# EAGLE board Roboteq_Board_V1.2 (EAGLE 9.6.2)
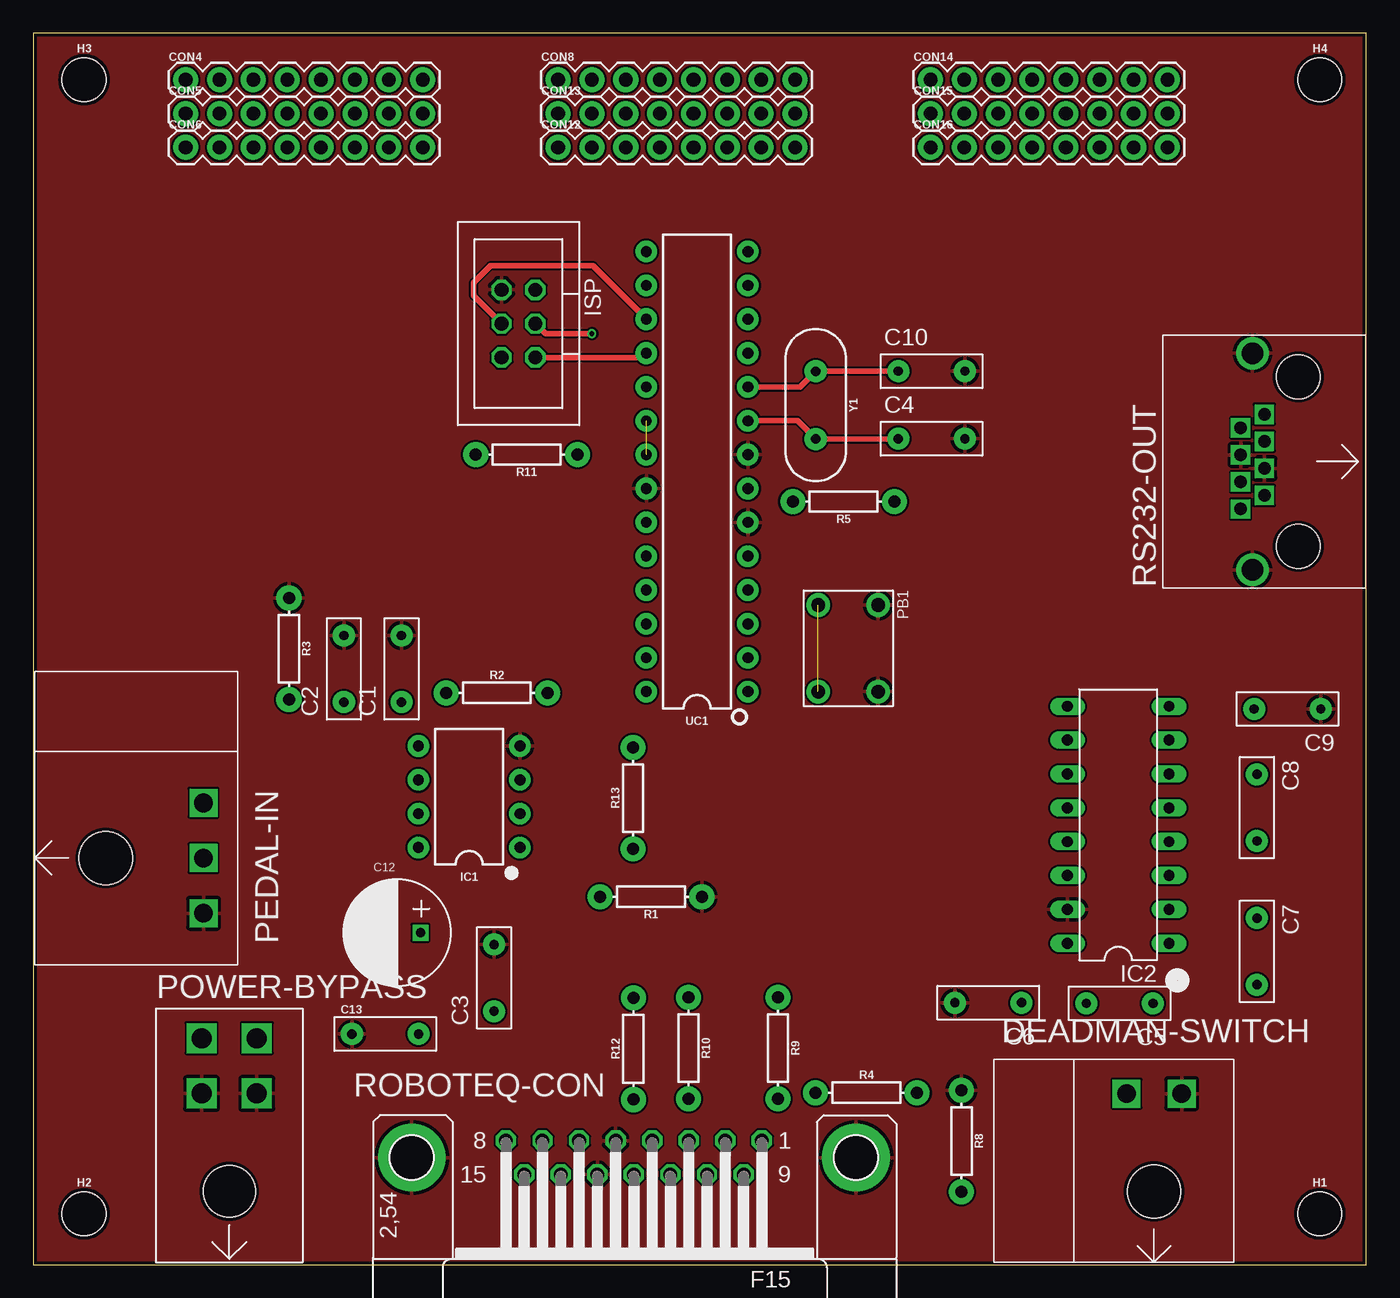
[diagram p0: board, top side]
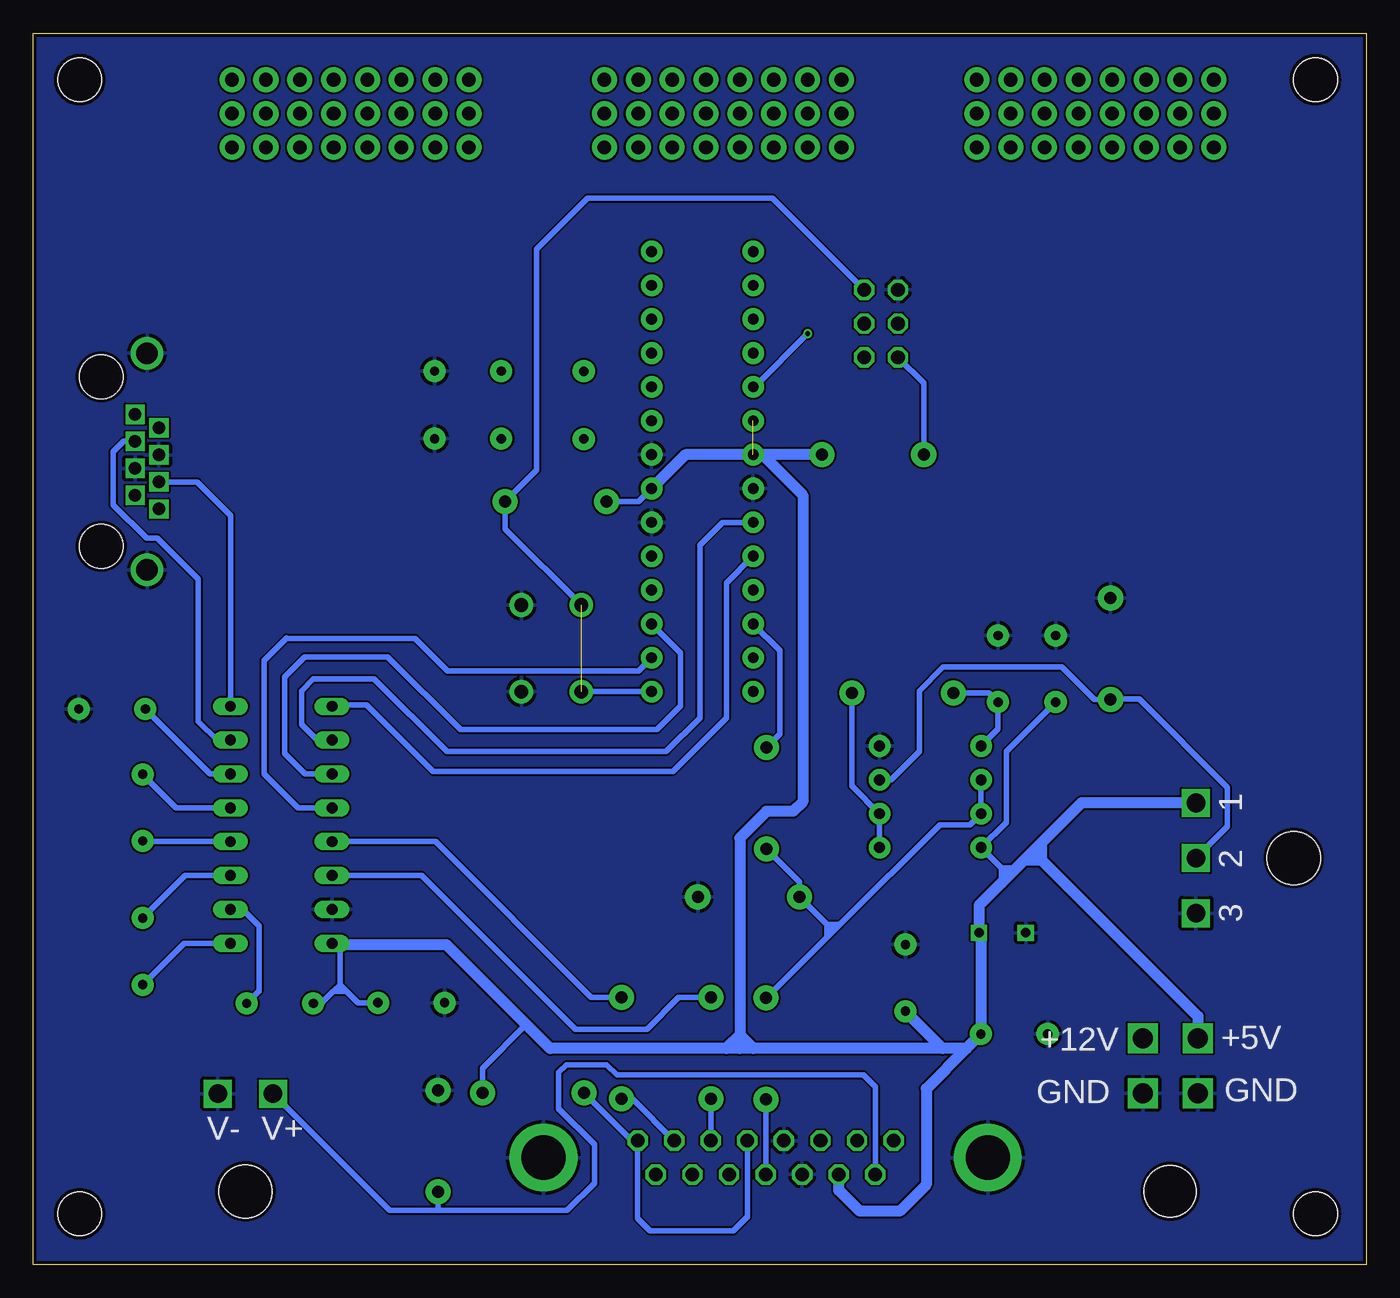
[diagram p1: board, bottom side, seen from below]

Size 100 x 92.38 mm. Coordinates in mm from the lower left corner, seen from the top.
Outline: 0,0 100,0 100,92.38 0,92.38 0,0
Copper layers (1*16): Top 0.035mm / dielectric 1.5mm / Bottom 0.035mm
Design rules "SeeedStudio_2layer_DRU_no_angle_20140221": minimum track width 6mil, minimum drill 12mil, track to track 6mil, track to pad 6mil, pad to pad 6mil, via to via 6mil, smd to smd 0mil, copper to edge 10mil, drill to drill 10mil, minimum pad ring 10mil, minimum via ring 6mil, stop-mask expansion 2mil, vias tented up to drill 100mil, thermal gap 10mil

## Footprints (pad centres in the part's own frame; a part is rotated, then mirrored left to right if it is on the bottom)
CAP-PTH-5MM = drill 0.7 pad 1.651: 1 -2.5,0; 2 2.5,0
CAPACITOR_100UF_50V = drill 0.7 square: + 1.75,0; - -1.75,0
1X08 = drill 1.016 pad 1.88: 1 0,0; 2 2.54,0; 3 5.08,0; 4 7.62,0; 5 10.16,0; 6 12.7,0; 7 15.24,0; 8 17.78,0
TE_2-PIN = drill 1.4 square: 1 -2.07,12.67; 2 2.07,12.67 | hole 4: 0,5.33
STAND-OFF = hole 3.302: 0,0
DIP08 = drill 0.813 pad 1.626: 1 -3.81,-3.81; 2 -1.27,-3.81; 3 1.27,-3.81; 4 3.81,-3.81; 5 3.81,3.81; 6 1.27,3.81; 7 -1.27,3.81; 8 -3.81,3.81
DIP16 = drill 0.813 long: 1 -8.89,-3.81; 2 -6.35,-3.81; 3 -3.81,-3.81; 4 -1.27,-3.81; 5 1.27,-3.81; 6 3.81,-3.81; 7 6.35,-3.81; 8 8.89,-3.81; 9 8.89,3.81; 10 6.35,3.81; 11 3.81,3.81; 12 1.27,3.81; 13 -1.27,3.81; 14 -3.81,3.81; 15 -6.35,3.81; 16 -8.89,3.81
ISP_CONNECTOR = drill 1.016 octagon: 1 2.54,1.27; 2 2.54,-1.27; 3 0,1.27; 4 0,-1.27; 5 -2.54,1.27; 6 -2.54,-1.27
PUSHBUTTON = drill 1.04 pad 1.778: 1 0,0; 2 6.5,0; 3 0,4.5; 4 6.5,4.5
TE_3-PIN = drill 1.4 square: 1 -4.14,12.67; 2 0,12.67; 3 4.14,12.67 | hole 4: 0,5.33
TE_4-PIN = drill 1.5 square: 1 2.07,11.48; 2 -2.07,11.48; 3 2.07,7.34; 4 -2.07,7.34 | hole 3.91: 0,0
AXIAL-0.3 = drill 0.9 pad 1.88: P$1 -3.81,0; P$2 3.81,0
D-SUB_2-ROW_15-PIN = drill 1.016 octagon: 1 -9.601,-1.27; 2 -6.858,-1.27; 3 -4.115,-1.27; 4 -1.372,-1.27; 5 1.372,-1.27; 6 4.115,-1.27; 7 6.858,-1.27; 8 9.601,-1.27; 9 -8.23,1.27; 10 -5.486,1.27; 11 -2.743,1.27; 12 0,1.27; 13 2.743,1.27; 14 5.486,1.27; 15 8.23,1.27 | drill 3.302 pad 5.08: G1 -16.662,0; G2 16.662,0
RJ45 = drill 0.94 square: 1 9.9,2.54; 2 8.88,4.32; 3 7.87,2.54; 4 6.85,4.32; 5 5.84,2.54; 6 4.82,4.32; 7 3.81,2.54; 8 2.79,4.32 | drill 1.62: 9 -1.78,3.43; 10 14.48,3.43 | hole 3.3: 0,0; 12.7,0
DIP28 = drill 0.813 pad 1.626: 1 -16.51,-3.81; 2 -13.97,-3.81; 3 -11.43,-3.81; 4 -8.89,-3.81; 5 -6.35,-3.81; 6 -3.81,-3.81; 7 -1.27,-3.81; 8 1.27,-3.81; 9 3.81,-3.81; 10 6.35,-3.81; 11 8.89,-3.81; 12 11.43,-3.81; 13 13.97,-3.81; 14 16.51,-3.81; 15 16.51,3.81; 16 13.97,3.81; 17 11.43,3.81; 18 8.89,3.81; 19 6.35,3.81; 20 3.81,3.81; 21 1.27,3.81; 22 -1.27,3.81; 23 -3.81,3.81; 24 -6.35,3.81; 25 -8.89,3.81; 26 -11.43,3.81; 27 -13.97,3.81; 28 -16.51,3.81
HC49US = drill 0.7 pad 1.651: 1 -2.54,0; 2 2.54,0

## Placement (x,y rotation side)
C1  0.1uF  [CAP-PTH-5MM]  27.62,44.7 90 top
C2  0.1uF  [CAP-PTH-5MM]  23.3,44.7 90 top
C3  0.1uF  [CAP-PTH-5MM]  34.57,21.51 90 top
C4  22pF  [CAP-PTH-5MM]  67.39,61.97 0 top
C5  1uF  [CAP-PTH-5MM]  81.5,19.6 180 top
C6  1uF  [CAP-PTH-5MM]  71.64,19.65 180 top
C7  1uF  [CAP-PTH-5MM]  91.8,23.5 270 top
C8  1uF  [CAP-PTH-5MM]  91.8,34.29 270 top
C9  1uF  [CAP-PTH-5MM]  94.09,41.68 180 top
C10  22pF  [CAP-PTH-5MM]  67.39,67.03 0 top
C12  100uF  [CAPACITOR_100UF_50V]  27.3,24.9 0 top
C13  0.1uF  [CAP-PTH-5MM]  26.4,17.3 0 top
CON4  1X08  [1X08]  11.43,88.9 0 top
CON5  1X08  [1X08]  11.43,86.36 0 top
CON6  1X08  [1X08]  11.43,83.82 0 top
CON8  1X08  [1X08]  39.37,88.9 0 top
CON12  1X08  [1X08]  39.37,83.82 0 top
CON13  1X08  [1X08]  39.37,86.36 0 top
CON14  1X08  [1X08]  67.31,88.9 0 top
CON15  1X08  [1X08]  67.31,86.36 0 top
CON16  1X08  [1X08]  67.31,83.82 0 top
DEADMAN-SWITCH  TE_2-PIN  [TE_2-PIN]  84.08,0.16 0 top
H1  STAND-OFF  [STAND-OFF]  96.52,3.81 0 top
H2  STAND-OFF  [STAND-OFF]  3.81,3.81 0 top
H3  STAND-OFF  [STAND-OFF]  3.81,88.9 0 top
H4  STAND-OFF  [STAND-OFF]  96.52,88.9 0 top
IC1  TLV272  [DIP08]  32.7,35.1 90 top
IC2  RS232-TTL_MAX232E  [DIP16]  81.4,33 90 top
ISP  ISP  [ISP_CONNECTOR]  36.4,70.6 270 top
PB1  [PUSHBUTTON]  58.88,49.48 270 top
PEDAL-IN  TE_3-PIN  [TE_3-PIN]  0.1,30.5 270 top
POWER-BYPASS  TE_4-PIN  [TE_4-PIN]  14.7,5.5 0 top
R1  100k  [AXIAL-0.3]  46.34,27.59 180 top
R2  10k  [AXIAL-0.3]  34.77,42.9 0 top
R3  100k  [AXIAL-0.3]  19.18,46.2 270 top
R4  10k  [AXIAL-0.3]  62.5,12.9 0 top
R5  10k  [AXIAL-0.3]  60.79,57.25 180 top
R8  10k  [AXIAL-0.3]  69.64,9.27 270 top
R9  0  [AXIAL-0.3]  55.87,16.23 270 top
R10  0  [AXIAL-0.3]  49.16,16.24 270 top
R11  0  [AXIAL-0.3]  37.01,60.78 180 top
R12  0  [AXIAL-0.3]  45.02,16.19 90 top
R13  0  [AXIAL-0.3]  45,35 90 top
ROBOTEQ-CON  D-SUB_2-ROW_15-PIN  [D-SUB_2-ROW_15-PIN]  45.06,8.03 180 top
RS232-OUT  RJ45  [RJ45]  94.9,53.9 90 top
UC1  328P  [DIP28]  49.8,59.5 90 top
Y1  16MHz  [HC49US]  58.7,64.48 270 top

## Library data of the parts
C1-C10 C12 C13 R1-R5 R8-R13 = EcoCar-Passives
CON4-CON6 CON8 CON12-CON16 = EcoCar-Connectors-2.54mm
DEADMAN-SWITCH PEDAL-IN POWER-BYPASS ROBOTEQ-CON RS232-OUT = EcoCar-Connectors
H1-H4 = EcoCar-Miscellaneous
IC1 IC2 = EcoCar-Integrated-Circuits
ISP = EcoCar-Microcontrollers
PB1 = EcoCar-Electromechanical
UC1 = EcoCar-Microcontrollers; PROD_ID: IC-09136
Y1 = EcoCar-Microcontrollers; PROD_ID: XTAL-08181; SF_ID: COM-00536

## Nets
5V: C2.1 C3.1 C5.2 C6.1 C12.+ C13.2 IC1.8 IC2.16 PEDAL-IN.1 POWER-BYPASS.2 R4.P$2 R5.P$2 R11.P$1 ROBOTEQ-CON.14 UC1.7 UC1.20 UC1.21
ANALOG_MOTOR_SIGNAL: IC1.6 IC1.7 R1.P$2 R12.P$2 R13.P$1
CANH: ROBOTEQ-CON.7
CANL: ROBOTEQ-CON.6
DEADMAN_SWITCH: R4.P$1 ROBOTEQ-CON.1 ROBOTEQ-CON.4
DEADMAN_SWITCH2: DEADMAN-SWITCH.1 R8.P$2 ROBOTEQ-CON.15
DIN2: ROBOTEQ-CON.8
DIN4: ROBOTEQ-CON.11
DIN5: ROBOTEQ-CON.10
DOUT2: ROBOTEQ-CON.9
GND: C1.2 C2.2 C3.2 C4.2 C6.2 C9.1 C10.2 C12.- C13.1 DEADMAN-SWITCH.2 IC1.4 IC2.15 ISP.6 PB1.3 PB1.4 PEDAL-IN.3 POWER-BYPASS.3 POWER-BYPASS.4 R1.P$1 R3.P$1 R8.P$1 ROBOTEQ-CON.5 ROBOTEQ-CON.13 ROBOTEQ-CON.G1 ROBOTEQ-CON.G2 RS232-OUT.4 RS232-OUT.5 RS232-OUT.9 RS232-OUT.10 UC1.6 UC1.8 UC1.22
LOW_PASS_OUT: C1.1 IC1.5 R2.P$1
MISO: ISP.1 UC1.18
MOSI: ISP.4 UC1.17
N$1: R9.P$2 ROBOTEQ-CON.2
N$2: IC1.1 IC1.2 R2.P$2
N$3: R13.P$2 UC1.26
N$4: C4.1 UC1.9 Y1.2
N$5: C10.1 UC1.10 Y1.1
N$6: C7.2 IC2.1
N$7: C5.1 IC2.2
N$8: C7.1 IC2.3
N$9: C8.2 IC2.4
N$10: C8.1 IC2.5
N$11: C9.2 IC2.6
N$13: R10.P$2 ROBOTEQ-CON.3
N$14: ISP.2 R11.P$2
N$15: R12.P$1 ROBOTEQ-CON.12
PEDAL_OUT: IC1.3 PEDAL-IN.2 R3.P$2
RESET: ISP.5 PB1.1 PB1.2 R5.P$1 UC1.1
RX_MOTOR_RS232: IC2.13 R9.P$1
RX_MOTOR_TTL: IC2.12 UC1.2
RX_OUT_RS232: IC2.8 RS232-OUT.6
RX_OUT_TTL: IC2.9 UC1.24
SCK: ISP.3 UC1.19
TX_MOTOR_RS232: IC2.14 R10.P$1
TX_MOTOR_TTL: IC2.11 UC1.3
TX_OUT_RS232: IC2.7 RS232-OUT.3
TX_OUT_TTL: IC2.10 UC1.23

## Tracks (layer width: path | path; a pad name or v marks a point on that pad's centre or on a via)
5V  (1 unrouted)
  Bottom 0.406: IC2.16 77,23.52 77,21 | 77,21 76.49,20.49 | 76.49,20.49 75.65,19.65 C6.1 | 77,21 77.51,20.49 | 77.51,20.49 78.4,19.6 C5.2 | 77.51,20.49 77,20.49 | 77,20.49 76.49,20.49 | 77,20.49 77,21 | 63.01,18.01 66.31,14.72 R4.P$2 | 29.05,25.45 C12.+ | 27.38,29.77 IC1.8 27,33.18 27,38.5 C2.1 | 27.36,29.77 27,29.4 27,29 | 26.03,29.97 26.23,29.77 27.38,29.77 | 27.38,29.77 27.36,29.77 | 27.36,29.77 27.36,28.64 | R5.P$2 54.59,57.25 UC1.7
  Bottom 0.813: ROBOTEQ-CON.14 39.57,5.57 38,4 35,4 33,6 33,13.2 29.98,16.22 | PEDAL-IN.1 21.36,34.64 24.32,31.68 | 24.32,31.68 25,31 | 25,31 25.68,30.32 | 25.68,30.32 26.03,29.97 27,29 27.36,28.64 29.05,26.95 C12.+ 28.9,24.75 C13.2 29.98,16.22 | 25,31 24.32,30.32 | 24.32,30.32 12.63,18.63 POWER-BYPASS.2 | 24.32,30.32 24.32,31.68 | 24.32,30.32 25.68,30.32 | 29.98,16.22 31.78,16.22 | 31.78,16.22 45.97,16.22 | 45.97,16.22 47,16.22 | 47,16.22 48.03,16.22 | 48.03,16.22 61.22,16.22 63.01,18.01 69,24 77.48,24 IC2.16 | UC1.7 51.07,60.77 UC1.21 45.31,60.77 | 47,17.24 47,16.22 | 45.97,16.22 47,17.24 | 47,17.24 48.03,16.22 | 47,17.24 47,32 45,34 43,34 42.27,34.73 42.27,57.73 45.31,60.77 | C3.1 31.78,16.22 | R11.P$1 45.31,60.77
ANALOG_MOTOR_SIGNAL
  Bottom 0.406: IC1.6 IC1.7 29.72,33 32,33 39.48,25.52 | 39.48,25.52 40,25 | 40,25 40.37,24.63 | 40.37,24.63 45,20 R12.P$2 | R13.P$1 42.53,28.72 R1.P$2 40.45,25.52 | 40.45,25.52 40,25.07 40,25 | 39.48,25.52 40.45,25.52 | 40.45,25.52 40.45,24.7 40.37,24.63
DEADMAN_SWITCH
  Bottom 0.406: ROBOTEQ-CON.4 46.43,3.57 47.46,2.54 53.72,2.54 54.66,3.48 ROBOTEQ-CON.1 55.09,9.3 R4.P$1
DEADMAN_SWITCH2
  Bottom 0.406: ROBOTEQ-CON.15 36.83,13.34 37.72,14.22 56.22,14.22 57,15 60,15 60.58,14.42 60.58,11.68 57.91,9.02 57.91,6.1 59.94,4.06 69.6,4.06 | DEADMAN-SWITCH.1 73.25,4.06 69.6,4.06 | R8.P$2 69.64,4.11 69.6,4.06
GND
  pour Top: -3.81,96.52 -3.81,-11.43 104.14,-11.43 104.14,96.52
  pour Bottom: -6.35,99.06 -6.35,-13.97 106.68,-13.97 106.68,99.06
LOW_PASS_OUT
  Bottom 0.406: IC1.5 27.62,40.18 C1.1 28.32,42.9 R2.P$1
MISO
  Top 0.406: ISP.1 45.66,68.06 UC1.18
MOSI
  Top 0.406: ISP.4 33.02,72.71 33.02,73.66 34.29,74.93 41.99,74.93 UC1.17
N$1
  Bottom 0.406: R9.P$2 55.04,12.42 ROBOTEQ-CON.2
N$2
  Bottom 0.406: IC1.1 IC1.2 38.58,35.9 R2.P$2
N$3
  Bottom 0.406: UC1.26 44,46.08 44,39.81 R13.P$2
N$4
  Top 0.406: UC1.9 57.33,63.31 Y1.2 64.87,61.94 C4.1
  Bottom 0.406: 64.87,61.94 C4.1
N$5
  Top 0.406: UC1.10 57.53,65.85 Y1.1 C10.1
  Bottom 0.406: C10.1
N$6
  Bottom 0.406: IC2.1 88.69,24.11 C7.2
N$7
  Bottom 0.406: IC2.2 84.31,26.65 83.06,25.4 83.06,20.54 C5.1
N$8
  Bottom 0.406: IC2.3 88.61,29.19 C7.1
N$9
  Bottom 0.406: C8.2 91.74,31.73 IC2.4
N$10
  Bottom 0.406: C8.1 89.28,34.27 IC2.5
N$11
  Bottom 0.406: C9.2 86.72,36.81 IC2.6
N$13
  Bottom 0.406: R10.P$2 49.17,12.41 ROBOTEQ-CON.3
N$14
  Bottom 0.406: R11.P$2 33.2,66.13 ISP.2
N$15
  Bottom 0.406: ROBOTEQ-CON.12 45.02,6.8 R12.P$1
PEDAL_OUT
  Bottom 0.406: PEDAL-IN.2 10.41,32.86 10.41,35.81 17.02,42.42 19.15,42.42 R3.P$2 20.39,42.39 22.83,44.83 31.75,44.83 33.53,43.05 33.53,38.48 35.64,36.37 IC1.3
RESET  (1 unrouted)
  Bottom 0.406: PB1.1 64.6,55.2 R5.P$1 62.23,59.62 62.23,76.2 58.42,80.01 44.54,80.01 ISP.5 | UC1.1 PB1.2
RX_MOTOR_RS232
  Bottom 0.406: R9.P$1 58.14,20.04 69.83,31.73 IC2.13
RX_MOTOR_TTL
  Bottom 0.406: IC2.12 80.12,34.27 82.68,36.83 82.68,45.32 81,47 80.99,46.99 71.37,46.99 68.91,44.53 54.61,44.53 UC1.2
RX_OUT_RS232
  Bottom 0.406: RS232-OUT.6 87.72,58.72 85.21,56.21 IC2.8
RX_OUT_TTL
  Bottom 0.406: UC1.24 48,51.14 48,41 52,37 70,37 75,42 77.48,42 IC2.9
SCK  (via drill 0.35)
  Top 0.406: ISP.3 38.42,69.85 v41.91,69.85
  Bottom 0.406: v41.91,69.85 45.91,65.85 UC1.19
TX_MOTOR_RS232
  Bottom 0.406: IC2.14 77.57,29.21 70.87,29.21 59.31,17.65 53.98,17.65 51.58,20.05 R10.P$1
TX_MOTOR_TTL
  Bottom 0.406: UC1.3 51.44,45.9 51.44,41.91 53.21,40.13 67.94,40.13 73.41,45.59 79.63,45.59 81.15,44.07 81.15,38.35 79.61,36.81 IC2.11
TX_OUT_RS232
  Bottom 0.406: IC2.7 86.21,39.35 87.63,40.77 87.63,51.44 90.69,54.5 91.5,54.5 94,57 94,61 93.23,61.77 RS232-OUT.3
TX_OUT_TTL
  Bottom 0.406: UC1.23 48.31,55.69 50,54 50,41 52.52,38.48 68.96,38.48 74.42,43.94 78.99,43.94 79.88,43.05 79.88,40.51 78.72,39.35 IC2.10